# Altium PCB MASTERs26_PCB.PcbDoc (part 1 of 3)
Units mm, origin at the board's own origin, x right, y up, seen from the top; angles counter-clockwise.
Board outline 170 x 105 mm, 4 copper layers (Top Layer, Layer 2, PWR, Bottom Layer), stack 1.58 mm thick; 78 components, 59 nets, 255 pads, 54 vias.
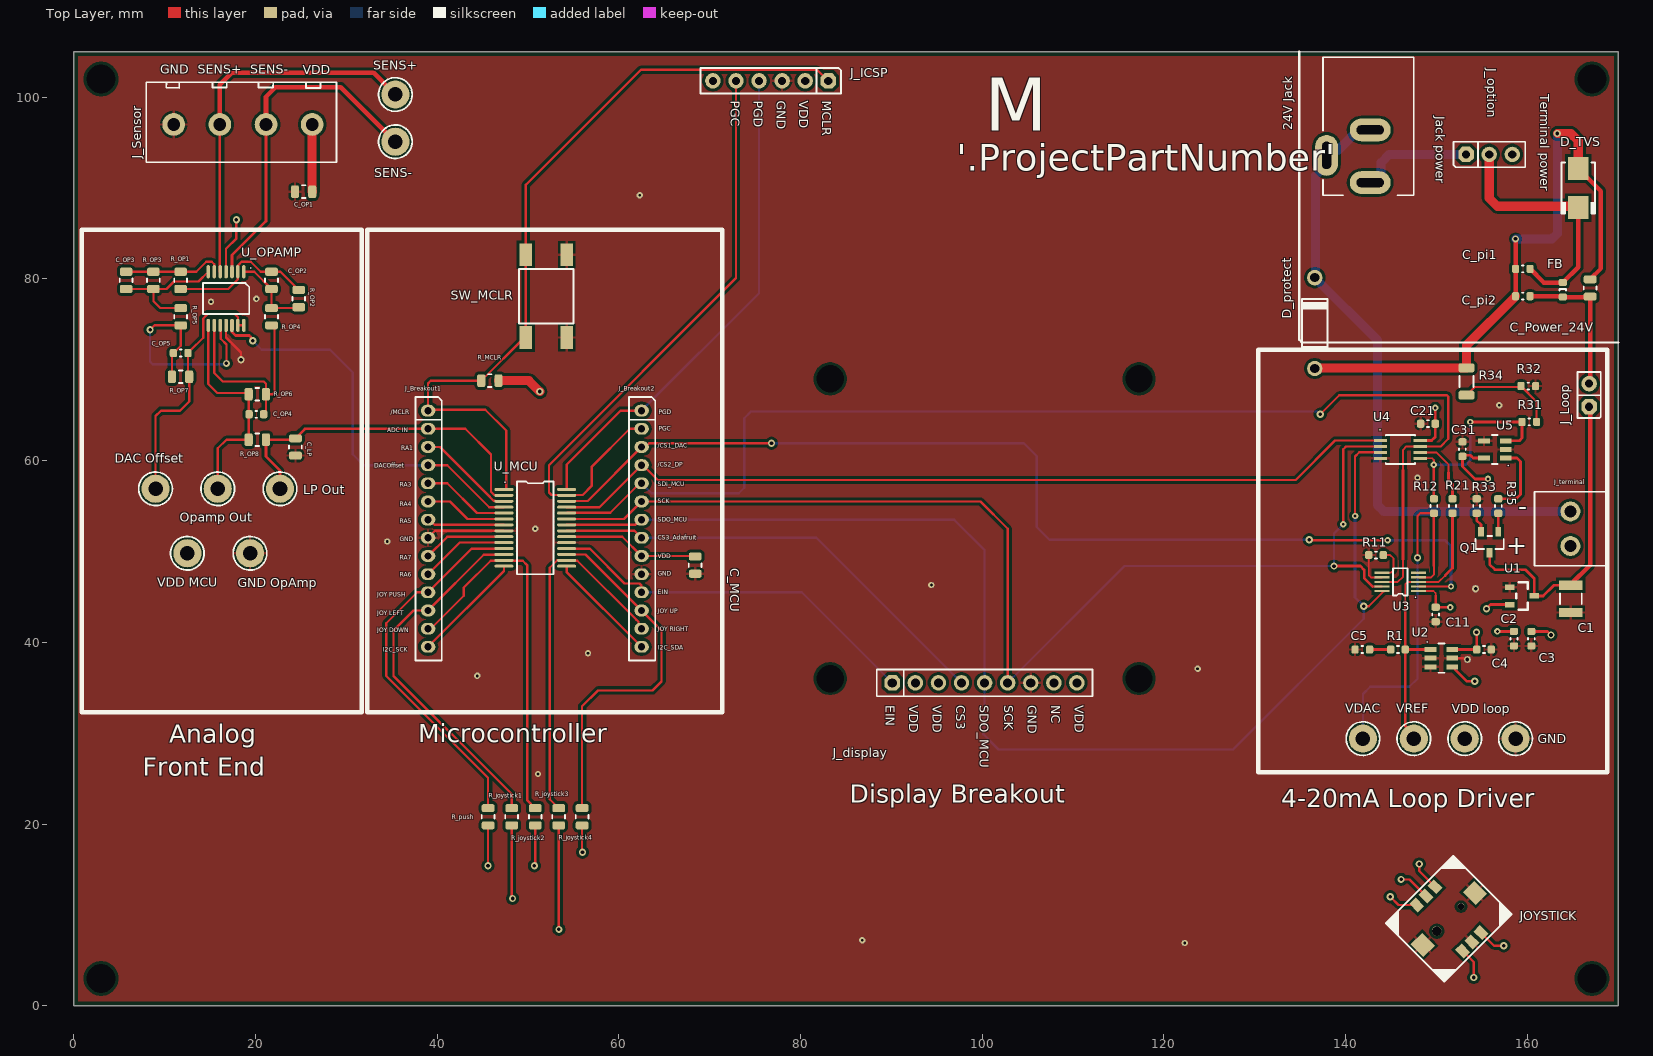
[diagram p0: Top Layer view]
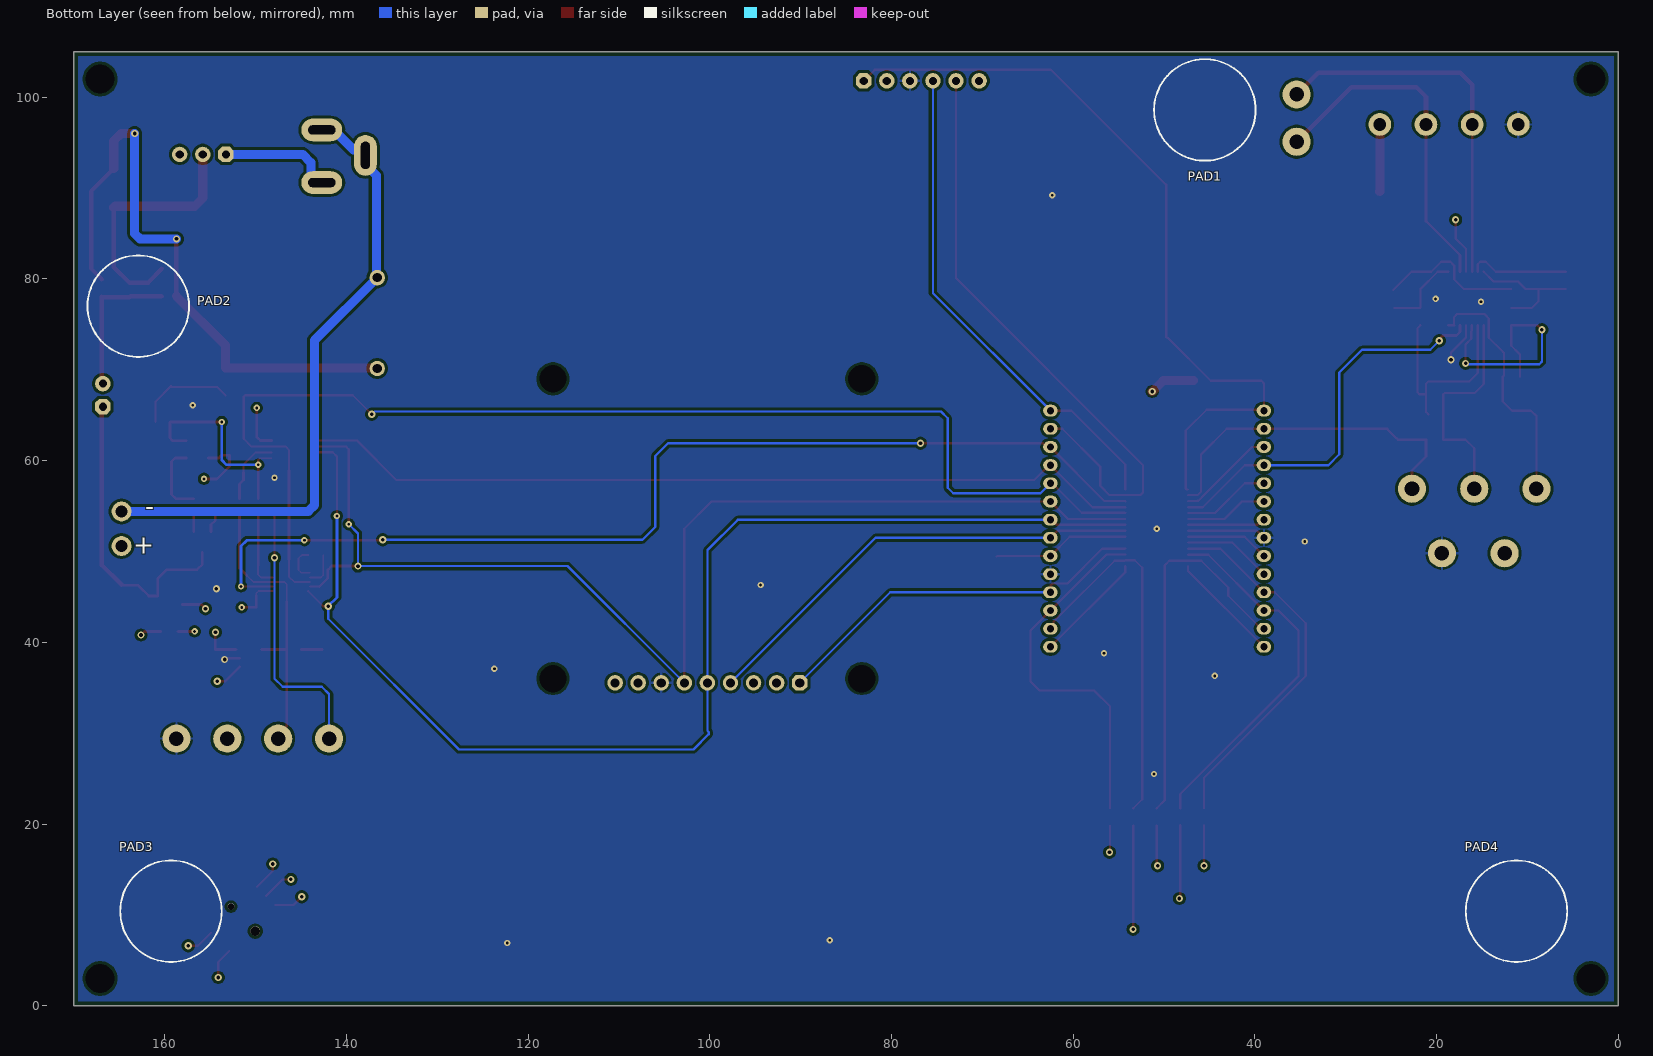
[diagram p1: Bottom Layer view, seen from below]
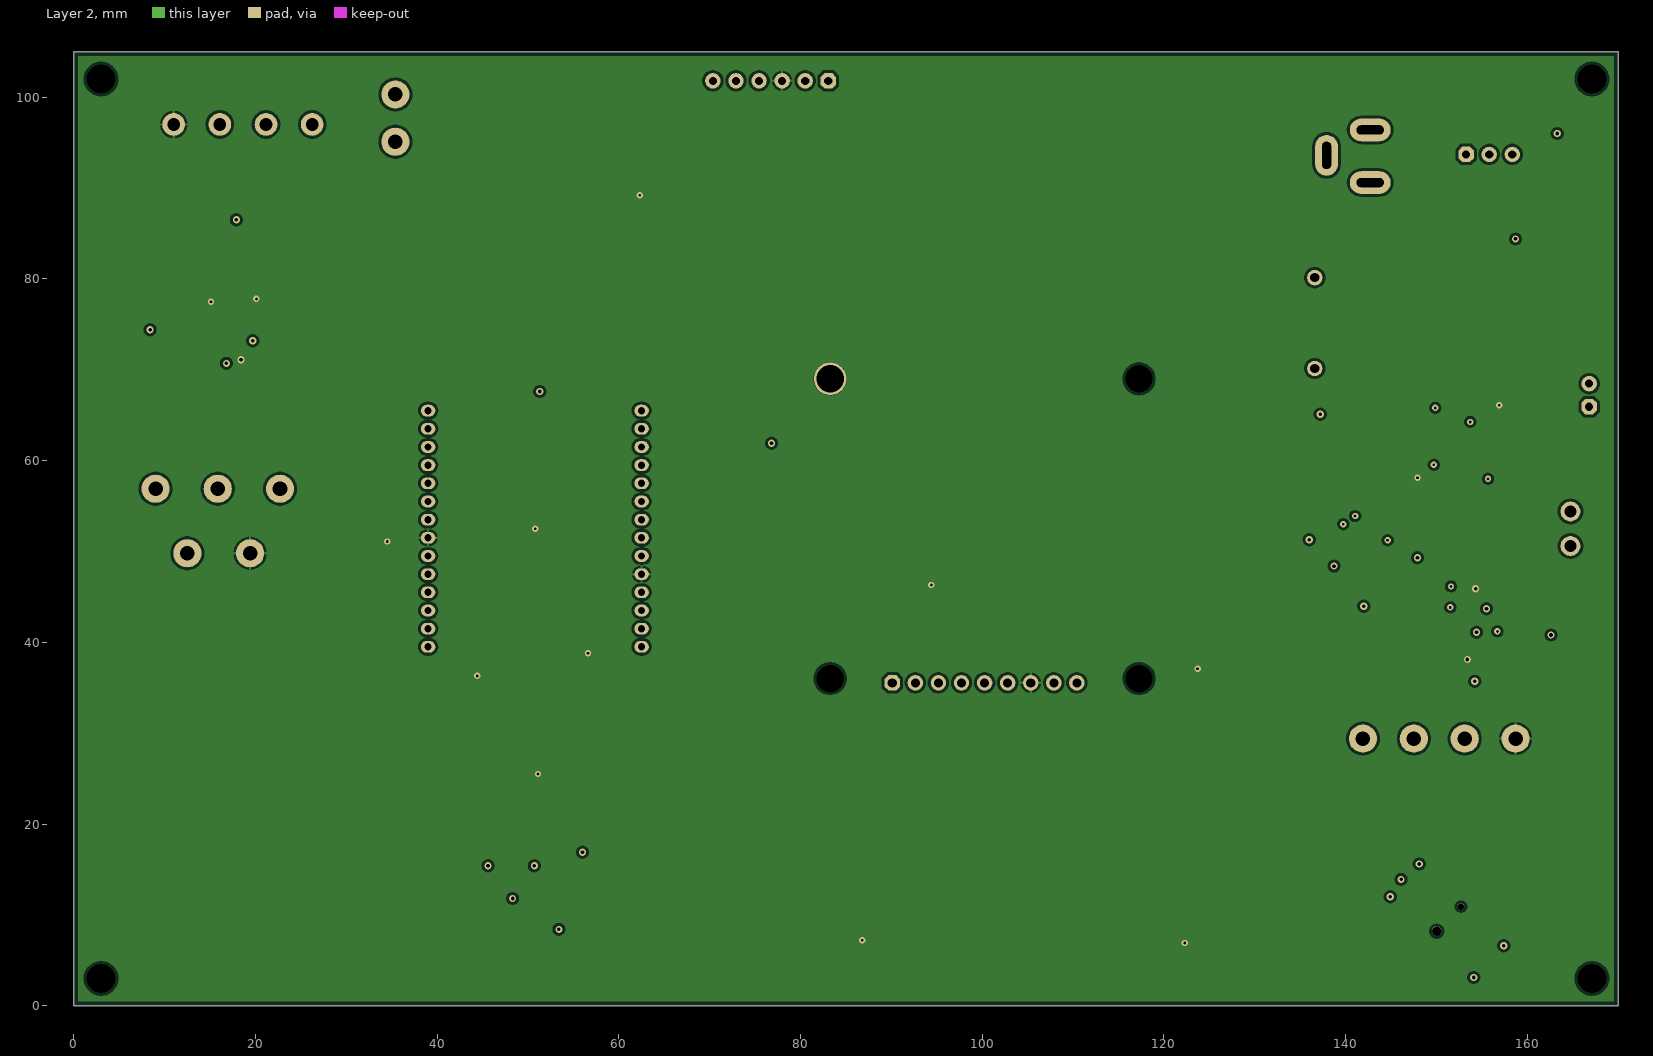
[diagram p2: Layer 2]
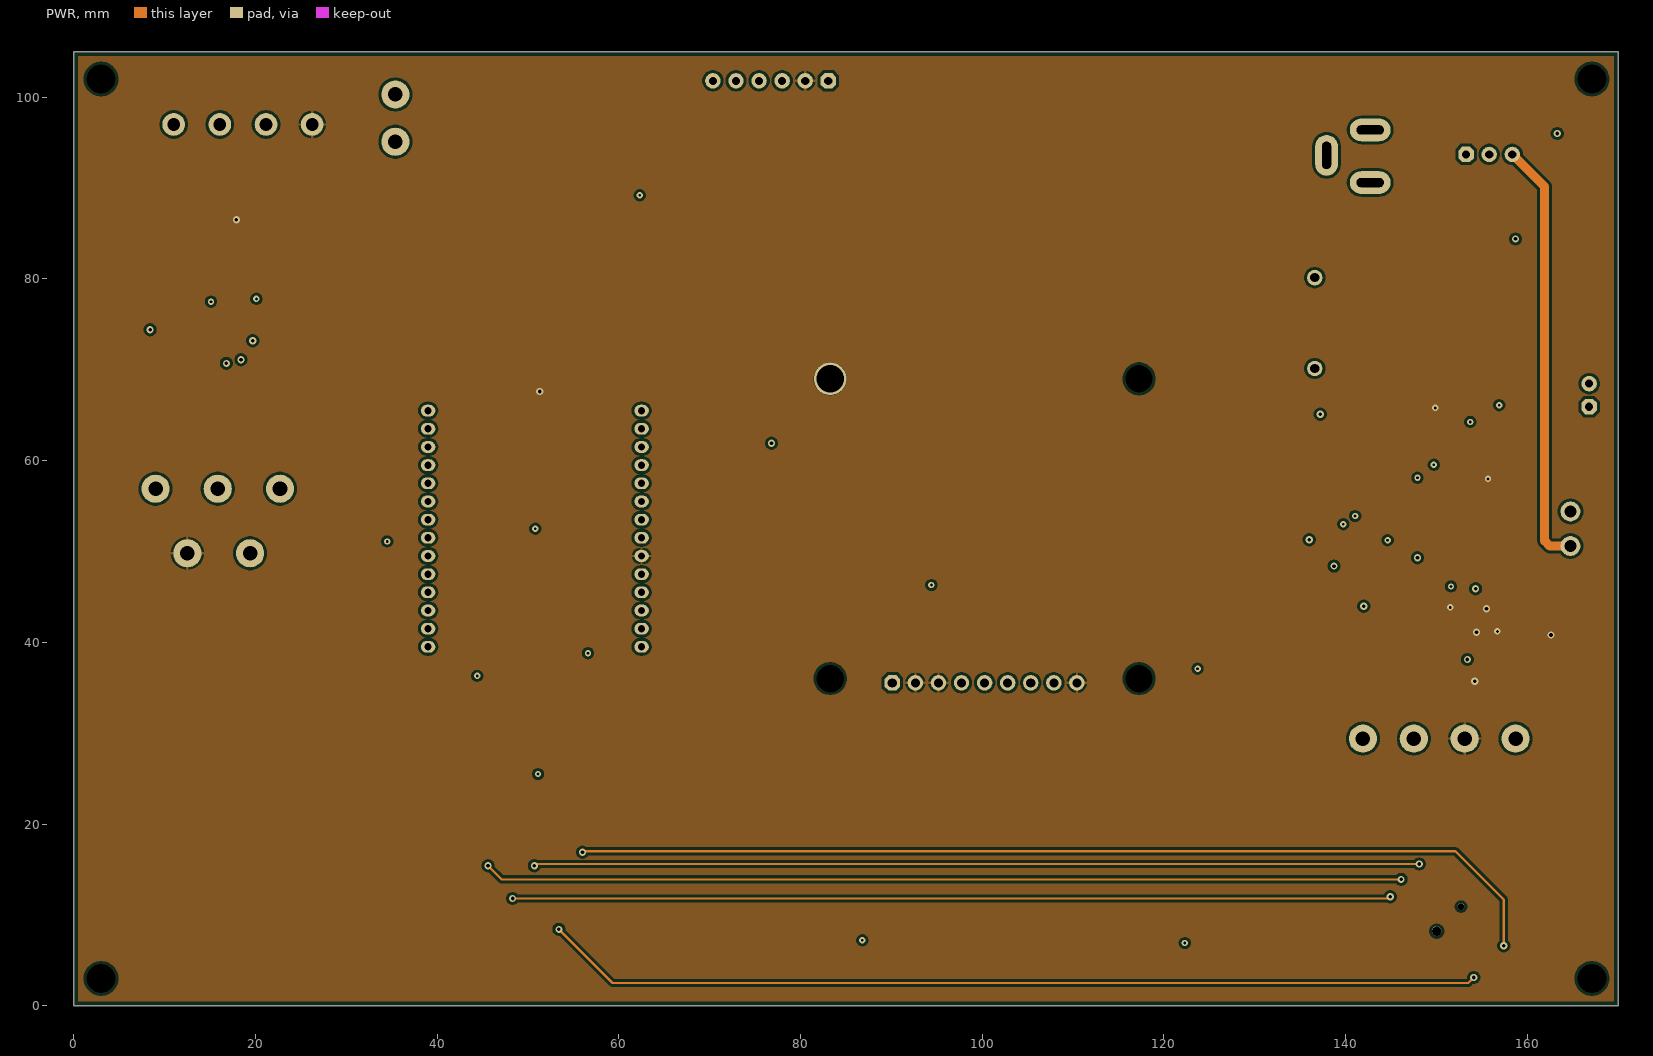
[diagram p3: PWR]

## Layer stack, top to bottom
Top Solder: solder mask 0.01, Solder Resist, Dk 3.5
Top Layer: signal copper 0.035
Dielectric 1: prepreg 0.22, PP-006, Dk 4.1
Layer 2: signal copper 0.035
Dielectric1: core 1, FR-4, Dk 4.8
PWR: signal copper 0.035
Dielectric 4: prepreg 0.22, PP-006, Dk 4.1
Bottom Layer: signal copper 0.035
Bottom Solder: solder mask 0.01, Solder Resist, Dk 3.5

## Board outline
0,0 0,105 170,105 170,0

## Design rules (kind name [scope] priority, off if disabled: settings)
AcuteAngle [All] p1: minimum=9.00000000000000E+0001 checktracksonly=TRUE
BoardOutlineClearance "Ignore Title Block elements" [InNamedUnion('Title Block')] p1: gap=0 ignorepadtopadclearanceinfootprint=FALSE
BoardOutlineClearance BoardOutlineClearance_Overlay [OnLayer('Top Overlay','Bottom Overlay')] p2: gap=0.2 ignorepadtopadclearanceinfootprint=FALSE
BoardOutlineClearance [All] p3: gap=0.5 ignorepadtopadclearanceinfootprint=FALSE
Clearance "Net to Polygon 0.5mm" [InNet('your net here') vs (IsRegion)] p1: gap=0.5 ignorepadtopadclearanceinfootprint=FALSE
Clearance "Poly 0.3mm" [(IsRegion)] p2: gap=0.3 ignorepadtopadclearanceinfootprint=FALSE
Clearance [All] p3: gap=0.25 ignorepadtopadclearanceinfootprint=TRUE
ComponentClearance ComponentClearance_ignore [HasFootprint('NET_TIE_0.5mm')] p1: gap=0 collisioncheckmode=3 verticalgap=0 showdistances=FALSE
ComponentClearance [All] p2: gap=0.2 collisioncheckmode=3 verticalgap=0.2 showdistances=FALSE
DiffPairsRouting [All] p1: maxlimit=0.254 minlimit=0.25 mostfreqgap=0.254 toplayer_maxgap=0.25 toplayer_prefgap=0.25 toplayer_minwidth=0.25 toplayer_maxwidth=0.25 toplayer_prefwidth=0.25 midlayer2_mingap=0.254 midlayer2_minwidth=0.381 midlayer2_maxwidth=0.381 midlayer2_prefwidth=0.381 midlayer3_mingap=0.254 midlayer3_minwidth=0.381 midlayer3_maxwidth=0.381 midlayer3_prefwidth=0.381 bottomlayer_maxgap=0.25 bottomlayer_prefgap=0.25 bottomlayer_minwidth=0.25 bottomlayer_maxwidth=0.25 bottomlayer_prefwidth=0.25 maxuncoupledlength=12.7
FabricationTestPointUsage TestPointUsage [All] p1: valid=0 allowmultiple=FALSE
FabricationTestpoint Testpoint [All] p1: side=3 testpointundercomponent=TRUE minsize=1.016 maxsize=2.54 preferedsize=1.524 minholesize=0 maxholesize=1.016 preferedholesize=0.813 testpointgrid=0.025 allowsidetop=TRUE allowsidebottom=TRUE usegrid=TRUE gridtolerance=0
HoleSize [All] p1: absolutevalues=TRUE maxlimit=6 minlimit=0.25 maxpercent=80.000 minpercent=20.000
HoleToHoleClearance [All] p1: gap=0.3 allowstackedmicrovias=FALSE
MinimumAnnularRing [All] p1: minimumring=0.15
MinimumSolderMaskSliver [All] p1: minsoldermaskwidth=0.15
PasteMaskExpansion PasteMaskExpansion_DNP [IsPad AND HasCompParameterValue('Populated','DNP')] p1: expansion=-5
PasteMaskExpansion [All] p2: expansion=0
PlaneClearance PlaneClearance_pads [IsPad] p1: clearance=0.3
PlaneClearance PlaneClearance_drill [IsObjectKind('Hole')] p2: clearance=0.4
PlaneConnect PlaneConnect_full [IsVia] p1: planeconnectstyle=Direct reliefexpansion=0.5 reliefentries=4 reliefconductorwidth=0.3 reliefairgap=0.3
PlaneConnect [All] p2: planeconnectstyle=Relief reliefexpansion=0.3 reliefentries=4 reliefconductorwidth=0.25 reliefairgap=0.25
PolygonConnect PolygonConnect_0.7 [IsNamedPolygon('0.7mm') vs (InPadClass('All Pads'))] p1: connectstyle=Relief reliefconductorwidth=0.7 reliefentries=4 polygonreliefangle="90 Angle" airgapwidth=0.25
PolygonConnect PolygonConnect_0.5 [IsNamedPolygon('0.5mm') vs (InPadClass('All Pads'))] p2: connectstyle=Relief reliefconductorwidth=0.5 reliefentries=4 polygonreliefangle="90 Angle" airgapwidth=0.25
PolygonConnect PolygonConnect_full [All vs IsVia or IsNamedPolygon('full')] p3: connectstyle=Direct reliefconductorwidth=0 reliefentries=4 polygonreliefangle="90 Angle" airgapwidth=0.254
PolygonConnect [All] p4: connectstyle=Relief reliefconductorwidth=0.3 reliefentries=4 polygonreliefangle="90 Angle" airgapwidth=0.25
RoutingCorners [All] p1: cornerstyle=45-Degree minsetback=2.5 maxsetback=2.5
RoutingLayers [All] p1: top layer_v5=TRUE mid layer 2_v5=FALSE mid layer 3_v5=TRUE bottom layer_v5=TRUE
RoutingVias [All] p1: holewidth=0.4 width=0.8 viastyle="Through Hole" minholewidth=0.3 minwidth=0.7 maxholewidth=1.6 maxwidth=2.5
SMDToCorner [All] p1: distance=19685
ShortCircuit [IsNet] p1: allowed=FALSE
SilkToSilkClearance [All] p1: silktosilkclearance=0.15
SilkToSolderMaskClearance SilkscreenOverComponentPads [IsPad] p1: minsilkscreentomaskgap=0.2 clearancetoexposedcopper=TRUE
SolderMaskExpansion SolderMaskExpansion_Component_Via [IsComponentVia] p1: expansion=0.075 istentingtop=FALSE soldermaskfromhole=TRUE
SolderMaskExpansion [All] p2: expansion=0.1 istentingtop=FALSE
SupplyNets "Schematic Supply Nets_6" [InNet('24V_Term_Not_Filtered')] p1: voltage=0.000
SupplyNets "Schematic Supply Nets_4" [InNet('24V_Jack_Not_Filtered')] p2: voltage=0.000
SupplyNets "Schematic Supply Nets" [InNet('24V_IN_Not_Filtered')] p3: voltage=0.000
SupplyNets "Schematic Supply Nets_5" [InNet('24V_Filtered')] p4: voltage=0.000
SupplyNets "Schematic Supply Nets_3" [InNet('GND')] p5: voltage=0.000
SupplyNets "Schematic Supply Nets_2" [InNet('2.5V')] p6: voltage=0.000
SupplyNets "Schematic Supply Nets_1" [InNet('3.3V')] p7: voltage=0.000
UnRoutedNet [All] p1: checkbadconnections=TRUE
ViasUnderSMD [All] p1: allowed=FALSE
Width Width_FG [All] p1: maxlimit=1 minlimit=0.2 preferedwidth=0.5
Width Width_24NotFiltered [InNet('24V_Not_Filtered')] p2: maxlimit=1 minlimit=0.25 preferedwidth=0.5
Width Width_24Filtered [InNet('24V_Filtered')] p3: maxlimit=1 minlimit=0.25 preferedwidth=0.5
Width Width_3V3 [InNet('3.3V')] p4: maxlimit=1 minlimit=0.25 preferedwidth=0.5
14 further rules are at their usual default settings.

## Classes and differential pairs
component class Power: "24V Jack" C_pi1 C_pi2 C_Power_24V D_protect D_TVS FB J_Loop J_option J_terminal
component class Pad: PAD1 PAD2 PAD3 PAD4
component class LoopDriver: C1 C2 C3 C4 C5 C11 C21 C31 GND Q1 R1 R11 R12 R21 R31 R32 R33 R34 R35 U1 U2 U3 U4 U5 VDAC "VDD loop" VREF

## Components (designator, comment, footprint, x,y, rotation, side; value= is the part's Value field where it differs from the comment)
"24V Jack" "CON JACK 2C 3P SPST" CON_JACK_POWER_TH_RA_WE_694106301002 142.7,93.6 r270 top value="POWER 2.1mm"
C1 "" CAP_C_1210 164.786,44.781 r90 top value=2.2uF
C2 "" CAP_C_0603 158.522,40.399 r90 top value=2.2uF
C3 "" CAP_C_0603 160.439,40.399 r90 top value=0.1uF
C4 "" CAP_C_0603 155.222,39.202 r0 top value=0.1uF
C5 "" CAP_C_0603 141.839,39.202 r0 top value=2.2uF
C11 "" CAP_C_0603 149.91,43.063 r270 top value=0.1uF
C21 "" CAP_C_0603 149.06,64.059 r0 top value=0.1uF
C31 "" CAP_C_0603 152.85,61.266 r90 top value=0.1uF
C_LP "Capacitor NP" CAP_C_0805 24.4,61.5 r90 top value=0.033uF
C_MCU "Capacitor NP" CAP_C_0805 68.4,48.5 r270 top value=10000pF
C_OP1 "Capacitor NP" CAP_C_0805 25.3,89.6 r180 top value=10000pF
C_OP2 "Capacitor NP" CAP_C_0805 21.763,79.838 r270 top value=0.015uF
C_OP3 "Capacitor NP" CAP_C_0805 5.763,79.838 r270 top value=0.015uF
C_OP4 "Capacitor NP" CAP_C_0603 20.1,65.1 r180 top value=6800pF
C_OP5 "Capacitor NP" CAP_C_0603 11.763,71.838 r0 top value=6800pF
C_pi1 "Capacitor NP" CAP_C_0603 159.5,81.1 r0 top value=0.1uF
C_pi2 "Capacitor NP" CAP_C_0603 159.5,78.1 r0 top value=0.1uF
C_Power_24V "Capacitor NP" CAP_C_0805 166.9,79 r270 top value=10uF
D_protect "Diode Single" DO-41 136.6,75.139 r90 top value=1N4007
D_TVS "Diode TVS Unidirectional" DO-214AA_SMB 165.6,90 r270 top value=SMBJ30A
"DAC Offset" "Test Point" CON_TP_TH_V_RED_KEC_5010 9,56.9 r0 top value="TP LOOP Red"
FB "Ferrite Bead" IND_C_0603 163.9,78.8 r270 top value=1k
GND "Test Point" CON_TP_TH_V_BLK_KEC_5011 158.7,29.4 r0 top value="TP LOOP Black TH"
"GND OpAmp" "Test Point" CON_TP_TH_V_BLK_KEC_5011 19.4,49.8 r0 top value="TP LOOP Black TH"
J_Breakout1 "Header 1x14" HDR_F_2_1x14_TH_V 39,52.5 r270 top value="HDR-2 Female 1x14"
J_Breakout2 "Header 1x14" HDR_F_2_1x14_TH_V 62.5,52.5 r270 top value="HDR-2 Female 1x14"
J_display "Header 1x9" HDR_F_2.54_1x9_TH_V_PPPC091LFBN-RC 100.255,35.541 r0 top value="HDR-2.54 Female 1x9"
J_ICSP "Header 1x6" HDR_M_2.54_1x6 76.7,101.8 r180 top value="HDR-2.54 Male 1x6"
J_Loop "Header 1x2" HDR_M_2.54_1x2 166.8,67.2 r90 top value="HDR-2.54 Male 1x2"
J_option "" HDR_M_2.54_1x3 155.8,93.7 r0 top value="HDR-2.54 Male 1x3"
J_Sensor "Header 1x4" CON_TERMINAL_5.08_1x4_TH_L8.50W20.5H10.20 18.62,97 r180 top value="TERMINAL 1x4"
J_terminal "" CON_TERMINAL_3.81_1x2_TH_RA_PHO_1727010 164.739,52.499 r90 top value="TERMINAL 1x2"
JOYSTICK "SW_TACT_SMD_ALPS_SKRHABE010" SW_TACT_SMD_ALPS_SKRHABE010 151.356,9.556 r315 top value="JOYSTICK 4-WAY"
"LP Out" "Test Point" CON_TP_TH_V_RED_KEC_5010 22.7,56.9 r0 top value="TP LOOP Red"
"Opamp Out" "Test Point" CON_TP_TH_V_RED_KEC_5010 15.85,56.9 r0 top value="TP LOOP Red" (schematic designator "OpAmp Out")
PAD1 "Rubber Pad Hemisphere" BUMP_3M_SJ5000_CYLINDRICAL_BLACK_D11.18H5 45.5,98.6 r180 bottom value="Bumpon Hemisphere Black"
PAD2 "Rubber Pad Hemisphere" BUMP_3M_SJ5000_CYLINDRICAL_BLACK_D11.18H5 162.9,77 r180 bottom value="Bumpon Hemisphere Black"
PAD3 "Rubber Pad Hemisphere" BUMP_3M_SJ5000_CYLINDRICAL_BLACK_D11.18H5 159.3,10.4 r180 bottom value="Bumpon Hemisphere Black"
PAD4 "Rubber Pad Hemisphere" BUMP_3M_SJ5000_CYLINDRICAL_BLACK_D11.18H5 11.2,10.4 r180 bottom value="Bumpon Hemisphere Black"
Q1 "" SOT-23-3 155.847,51.005 r180 top value=2N7002-G
R1 "" RES_C_0603 145.761,39.202 r0 top value=51R
R11 "" RES_C_0603 143.341,49.6 r0 top value=100k
R12 "" RES_C_0603 149.71,54.999 r90 top value=15k
R21 "" RES_C_0603 151.765,54.999 r90 top value=47k
R31 "" RES_C_0603 160.211,64.259 r180 top value=2.2k
R32 "" RES_C_0603 160.1,68.2 r0 top value=22R
R33 "" RES_C_0603 154.422,54.999 r270 top value=22R
R34 "" RES_C_1206 153.3,68.7 r90 top value=249R
R35 "" RES_C_0603 156.797,54.999 r270 top value=1.8k
R_joystick1 "Resistor" RES_C_0805 48.2,20.8 r270 top value=1k
R_joystick2 "Resistor" RES_C_0805 50.8,20.795 r90 top value=1k
R_joystick3 "Resistor" RES_C_0805 53.375,20.795 r270 top value=1k
R_joystick4 "Resistor" RES_C_0805 55.95,20.795 r270 top value=1k
R_MCLR "Resistor" RES_C_0805 45.8,68.8 r180 top value=10k
R_OP1 "Resistor" RES_C_0805 11.763,79.838 r270 top value=10k
R_OP2 "Resistor" RES_C_0805 24.763,77.838 r270 top value=100k
R_OP3 "Resistor" RES_C_0805 8.763,79.838 r270 top value=100k
R_OP4 "Resistor" RES_C_0805 21.763,75.838 r90 top value=10k
R_OP5 "Resistor" RES_C_0805 11.763,75.838 r270 top value=10k
R_OP6 "Resistor" RES_C_0805 20.2,67.3 r180 top value=200k
R_OP7 "Resistor" RES_C_0805 11.75,69.232 r0 top value=200k
R_OP8 "Resistor" RES_C_0805 20.2,62.3 r0 top value=4.7k
R_push "Resistor" RES_C_0805 45.6,20.8 r270 top value=1k
SENS+ "Test Point" CON_TP_TH_V_RED_KEC_5010 35.4,100.3 r0 top value="TP LOOP Red"
SENS- "Test Point" CON_TP_TH_V_BLK_KEC_5011 35.4,95.1 r0 top value="TP LOOP Black TH"
SW_MCLR "Switch 4 Pin" SW_SMD_6mmX6mm_TL3301 52,78.1 r90 top value="TACT SPST"
U1 "" SOT-23A-3 159.411,45.099 r270 top value=MCP1792T-3302H/CB
U2 "" SOT-23-6 150.539,38.252 r270 top value=MCP1501/2.50V
U3 "" MSOP-10 146.016,46.649 r180 top value=MCP48CMD21T-E/UN
U4 "" MSOP-8 146.016,61.232 r0 top value=MCP4152T-503E/MS
U5 "" SOT-23-5 156.422,61.232 r90 top value=MCP6021
U_MCU "PIC18F2XK42 SPDIP-28_SOIC-28_SSOP-28" SSOP-28_P0.65 50.8,52.6 r0 top value=PIC18F26Q71
U_OPAMP "MCP6XX4_9 SOIC-14_TSSOP-14_PDIP-14" TSSOP-14 16.763,77.838 r270 top value=MCP6V14
VDAC "" CON_TP_TH_V_RED_KEC_5010 141.9,29.4 r0 top value="TP LOOP Red"
"VDD loop" "" CON_TP_TH_V_RED_KEC_5010 153.1,29.4 r0 top value="TP LOOP Red"
"VDD MCU" "Test Point" CON_TP_TH_V_RED_KEC_5010 12.5,49.8 r0 top value="TP LOOP Red"
VREF "" CON_TP_TH_V_RED_KEC_5010 147.5,29.4 r0 top value="TP LOOP Red"

## Footprints (in the part's own frame and the unit in brackets; to place one, negate y for a bottom-side part, rotate by r counter-clockwise, add the part's x,y. Pads: shape width x height; smd on the part's side, far side on the other; paste and mask are expansions set on the pad)
BUMP_3M_SJ5000_CYLINDRICAL_BLACK_D11.18H5 [mm] "3M Bumpon Cylindrical D=11.18mm H=5mm"
  silkscreen extent -5.59,-5.58 5.59,5.58, body extent -4.89,-4.71 4.64,4.81, height 5.97
CAP_C_0603 [mm] "Chip Capacitor, 2-Leads, Body 1.6x0.8mm, IPC Medium Density"
  rrect50% 0.8x0.9 smd: 1(-0.8,0) 2(0.8,0)
  silkscreen extent -0.1,-0.38 0.1,0.38, body extent -0.8,-0.4 0.8,0.4, height 0.85
CAP_C_0805 [mm] "Chip Capacitor, 2-Leads, Body 2.0x1.3mm, IPC Medium Density"
  rrect50% 0.9x1.4 smd: 1(-0.95,0) 2(0.95,0)
  silkscreen extent -0.2,-0.7 0.2,0.7, body extent -1,-0.62 1,0.63, height 0.78
CAP_C_1210 [mm] "Chip Capacitor, 2-Leads, Body 3.2x2.5mm, IPC Medium Density"
  rect 1x2.6 smd: 1(-1.5,0) 2(1.5,0)
  silkscreen extent -0.6,-1.2 0.6,1.2, body extent -1.6,-1.25 1.6,1.25, height 0.95
CON_JACK_POWER_TH_RA_WE_694106301002 [mm] "CONN POWER JACK MALE 2.1MMX5.5mm CLSD"
  oval 2.5x4.5 hole 1 slot 3 at 90 deg: 1(3,0) 2(-2.8,0)
  oval 4.5x2.5 hole 1 slot 3 at 0 deg: 3(0,-4.8)
  silkscreen extent -10.8,-5.2 4.4,4.8, body extent -10.6,-5.05 3.9,4.45, height 10.35
CON_TERMINAL_3.81_1x2_TH_RA_PHO_1727010 [mm] "Terminal Block 3.81mm Pitch 1x2 PHO_1727010"
  round 2.2 hole 1.3: 1(-1.905,0) 2(1.905,0)
  silkscreen extent -4.07,-3.91 4.08,3.96, body extent -3.81,-3.61 3.81,3.69, height 8.51
CON_TERMINAL_5.08_1x4_TH_L8.50W20.5H10.20 [mm] "Screw Terminal 0395443004, 4-Way"
  round 2.5 hole 1.4: 1(-7.62,0) 2(-2.54,0) 3(2.54,0) 4(7.62,0)
  silkscreen extent -10.29,-4.65 10.64,4.17, body extent -10.49,-4.07 10.07,4.09, height 10
CON_TP_TH_V_BLK_KEC_5011 [mm] "TEST POINT PC MULTI PURPOSE BLK"
  round 3.1 hole 1.6: 1(0,0)
  silkscreen extent -1.85,-1.85 1.85,1.85, body extent -1.59,-1.59 1.59,1.59, height 8.13
CON_TP_TH_V_RED_KEC_5010 [mm] "TEST POINT PC MULTI PURPOSE RED"
  round 3.1 hole 1.6: 1(0,0)
  silkscreen extent -1.85,-1.85 1.85,1.85, body extent -1.59,-1.59 1.59,1.59, height 8.13
DO-41 [mm] "Diode Axial 10mm pitch, 5mm Length, 2.8mm Width"
  round 1.7 hole 1: 1(-5,0) 2(5,0)
  silkscreen extent -2.65,-1.4 2.65,1.4, body extent -5.43,-1.38 5.43,1.35, height 3.36
DO-214AA_SMB [mm] "SMB Molded Diode, 2-Leads, Body 5.3x3.6mm, IPC Medium Density"
  rect 2.5x2.3 smd: 1(-2.15,0) 2(2.15,0)
  silkscreen extent -2.8,-1.85 2.8,1.85, body extent -2.78,-1.8 2.62,1.8, height 2.3
HDR_F_2.54_1x9_TH_V_PPPC091LFBN-RC [mm]
  oct 1.7x1.7 hole 1: 1(-10.16,0)
  round 1.7 hole 1: 2(-7.62,0) 3(-5.08,0) 4(-2.54,0) 5(0,0) 6(2.54,0) 7(5.08,0) 8(7.62,0) 9(10.16,0)
  silkscreen extent -11.88,-1.47 11.88,1.47, body extent -11.68,-1.27 11.68,1.27, height 8.5
HDR_F_2_1x14_TH_V [mm] "14-Pin Socket Strip"
  oval 1.3x1.6 hole 0.8 mask+0.075: 1(-13,0) 2(-11,0) 3(-9,0) 4(-7,0) 5(-5,0) 6(-3,0) 7(-1,0) 8(1,0) 9(3,0) 10(5,0) 11(7,0) 12(9,0) 13(11,0) 14(13,0)
  silkscreen extent -14.5,-1.4 14.5,1.5, body extent -14.25,-1.15 14.25,1.25, height 4.46
HDR_M_2.54_1x2 [mm] "Header Male Vertical 2 Way 2.54mm Pitch"
  oct 1.7x1.7 hole 0.9: 1(-1.27,0)
  round 1.7 hole 0.9: 2(1.27,0)
  silkscreen extent -2.52,-1.27 2.54,1.28, body extent -2.54,-1.27 2.54,1.27, height 5.94
HDR_M_2.54_1x3 [mm] "Header Male Vertical 4 Way P=2.54mm"
  oct 1.7x1.7 hole 0.9: 1(-2.54,0)
  round 1.7 hole 0.9: 2(0,0) 3(2.54,0)
  silkscreen extent -3.94,-1.4 3.96,1.4, body extent -3.8,-1.26 3.82,1.28, height 5.94
HDR_M_2.54_1x6 [mm] "Header Male Vertical 6 Way 2.54mm Pitch"
  oct 1.7x1.7 hole 0.9: 1(-6.35,0)
  round 1.7 hole 0.9: 2(-3.81,0) 3(-1.27,0) 4(1.27,0) 5(3.81,0) 6(6.35,0)
  silkscreen extent -7.75,-1.4 7.7,1.4, body extent -7.62,-1.27 7.62,1.27, height 8.38
IND_C_0603 [mm] "Chip Inductor, 2-Leads, Body 1.6x0.8mm, IPC Medium Density"
  rrect50% 0.8x0.9 smd: 1(-0.8,0) 2(0.8,0)
  silkscreen extent -0.1,-0.35 0.1,0.35, body extent -0.8,-0.4 0.8,0.4, height 0.95
MSOP-8 [mm] "MSOP, 8-Leads, Body 4.9.0x3.0mm (max), Pitch 0.65mm, IPC Medium Density"
  rect 1.45x0.33 smd paste-0.064 mask+0.05: 1(-2.2,0.975) 2(-2.2,0.325) 3(-2.2,-0.325) 4(-2.2,-0.975) 5(2.2,-0.975) 6(2.2,-0.325) 7(2.2,0.325) 8(2.2,0.975)
  silkscreen extent -1.6,-1.6 1.6,1.6, body extent -2.45,-1.5 2.45,1.5, height 1.15
MSOP-10 [mm] "MSSOP, 10-Leads, Body 3.0x3.0mm (max), Pitch 0.50mm, IPC Medium Density"
  rect 1.65x0.25 smd mask+0.05: 1(-2.025,1) 2(-2.025,0.5) 3(-2.025,0) 4(-2.025,-0.5) 5(-2.025,-1) 6(2.025,-1) 7(2.025,-0.5) 8(2.025,0) 9(2.025,0.5) 10(2.025,1)
  silkscreen extent -0.8,-1.5 0.8,1.5, body extent -2.45,-1.5 2.45,1.5, height 1.15
RES_C_0603 [mm] "Chip Resistor, 2-Leads, Body 1.6x0.8mm, IPC Medium Density"
  rrect50% 0.8x0.9 smd: 1(-0.8,0) 2(0.8,0)
  silkscreen extent -0.1,-0.38 0.1,0.38, body extent -0.8,-0.4 0.8,0.4, height 0.3
RES_C_0805 [mm] "Chip Resistor, 2-Leads, Body 2.0x1.3mm, IPC Medium Density"
  rrect50% 0.9x1.4 smd: 1(-0.95,0) 2(0.95,0)
  silkscreen extent -0.2,-0.7 0.2,0.7, body extent -1,-0.63 1,0.63, height 0.78
RES_C_1206 [mm] "Chip Resistor, 2-Leads, Body 3.2x1.6mm, IPC Medium Density"
  rrect50% 1x1.75 smd: 1(-1.5,0) 2(1.5,0)
  silkscreen extent -0.6,-0.77 0.6,0.78, body extent -1.6,-0.8 1.6,0.8, height 1
SOT-23-3 [mm]
  rect 0.65x1.05 smd: 1(-0.95,-1.15) 2(0.95,-1.15) 3(0,1.15)
  silkscreen extent -1.55,-0.7 1.55,0.72, body extent -1.5,-1.25 1.5,1.25, height 1.09
SOT-23-5 [mm] "SOT-23-5"
  rect 0.55x1.3 smd: 1(-0.95,-1.2) 2(0,-1.2) 3(0.95,-1.2) 4(0.95,1.2) 5(-0.95,1.2)
  silkscreen extent -1.6,-0.33 1.6,0.33, body extent -1.5,-1.25 1.5,1.25, height 1.08
SOT-23-6 [mm] "SOT-23-6"
  rect 0.55x1.3 smd: 1(-0.95,-1.2) 2(0,-1.2) 3(0.95,-1.2) 4(0.95,1.2) 5(0,1.2) 6(-0.95,1.2)
  silkscreen extent -1.6,-0.33 1.6,0.33, body extent -1.5,-1.5 1.5,1.5, height 1.5
SOT-23A-3 [mm]
  rect 0.6x1 smd: 1(-0.95,-1.35) 2(0.95,-1.35) 3(0,1.35)
  silkscreen extent -1.52,-0.65 1.52,0.62, body extent -1.5,-1.25 1.5,1.25, height 1.09
SSOP-28_P0.65 [mm] "SOP, 28-Leads, Body 10.2x5.3mm (max), Pitch 0.65mm, IPC Medium Density"
  oval 2.1x0.33 smd mask+0.05: 1(-3.45,4.225) 2(-3.45,3.575) 3(-3.45,2.925) 4(-3.45,2.275) 5(-3.45,1.625) 6(-3.45,0.975) 7(-3.45,0.325) 8(-3.45,-0.325) 9(-3.45,-0.975) 10(-3.45,-1.625) 11(-3.45,-2.275) 12(-3.45,-2.925) 13(-3.45,-3.575) 14(-3.45,-4.225) 15(3.45,-4.225) 16(3.45,-3.575) 17(3.45,-2.925) 18(3.45,-2.275) 19(3.45,-1.625) 20(3.45,-0.975) 21(3.45,-0.325) 22(3.45,0.325) 23(3.45,0.975) 24(3.45,1.625) 25(3.45,2.275) 26(3.45,2.925) 27(3.45,3.575) 28(3.45,4.225)
  silkscreen extent -2,-5.1 2,5.1, body extent -4.1,-5.25 4.13,5.25, height 1.92
SW_SMD_6mmX6mm_TL3301 [mm]
  rect 2.5x1.4 smd: 1(-4.55,2.25) 2(4.55,2.25) 3(-4.55,-2.25) 4(4.55,-2.25)
  silkscreen extent -3,-3 3,3, body extent -5,-3 5,3, height 5.12
SW_TACT_SMD_ALPS_SKRHABE010 [mm]
  rect 1.35x1 smd: 1(-3.575,1.425) 2(-3.575,0) 3(-3.575,-1.425) 4(3.575,1.425) 5(3.575,0) 6(3.575,-1.425)
  rect 2x1.8 smd: 7(0,4.05) 8(0,-4.05)
  round 0.75 hole 0.75 unplated: 9(0,1.9)
  round 1.05 hole 1.05 unplated: 10(0,-1.9)
  silkscreen extent -4.58,-5.25 4.58,5.25, body extent -3.74,-3.75 3.74,3.75, height 5
TSSOP-14 [mm] "TSOP, 14-Leads, Body 5.1x4.5mm (max), Pitch 0.65mm, IPC Medium Density"
  oval 1.45x0.4 smd mask+0.05: 1(-2.95,1.95) 2(-2.95,1.3) 3(-2.95,0.65) 4(-2.95,0) 5(-2.95,-0.65) 6(-2.95,-1.3) 7(-2.95,-1.95) 8(2.95,-1.95) 9(2.95,-1.3) 10(2.95,-0.65) 11(2.95,0) 12(2.95,0.65) 13(2.95,1.3) 14(2.95,1.95)
  silkscreen extent -1.7,-2.55 1.7,2.55, body extent -3.2,-2.55 3.2,2.55, height 1.2

## Part data
"24V Jack": library part CON2146, Current=5A, Manufacturer 1="Wuerth Elektronik", Manufacturer Part Number 1=694106301002, Operating Temperature="-40C to 85C", Supplier Part Number 1=732-5930-ND, Voltage=24V, Assembly Type=TH, Category=Connector, ComponentLink1Description="SVN Datasheet", ComponentLink1URL=https://chn-vm-apps.microchip.com/mchprepo/parts/Datasheets/6941xx301002.pdf, ComponentLink2Description="Local Datasheet", ComponentLink2URL=C:\ALTIUM_WORK\00001_MCHP-CDB\Datasheets\6941xx301002.pdf, ComponentLink3Description="Open Symbol", ComponentLink3URL="C:\ALTIUM_WORK\00001_MCHP-CDB\Library\LibraryRefs\CON JACK 2C 3P SPST.SchLib", ComponentLink4Description="Open Footprint", ComponentLink4URL=C:\ALTIUM_WORK\00001_MCHP-CDB\Library\Footprints\CON_JACK_POWER_TH_RA_WE_694106301002.PcbLib, ComponentLink5Description="Open Footprint 2", ComponentLink6Description="Open Footprint 3", ComponentLink7Description="Open Footprint 4", Description_="CON POWER 2.1mm 5.5mm SWITCH TH R/A", Dev Tools Status=Production, MCHP-ID=CON2146, Owner="Narasimha Murthy", Populated=YES, Quantity Override=1, Restricted Sourcing=No, Revision=2, Status="MCL Design", Supplier 1=Digi-Key, Symbol="CON JACK 2C 3P SPST", Type=Power
C1: library part CAP2314, Manufacturer 1="Samsung Electro-Mechanics", Manufacturer 2="TDK Corporation", Manufacturer Part Number 1=CL32B225KCJSNNE, Manufacturer Part Number 2=C3225X7R2A225K230AB, Operating Temperature="-55C to +125C", Package=1210, Supplier Part Number 1=1276-3362-1-ND, Temperature Coefficient=X7R, Tolerance=10%, Voltage=100V, Category=Capacitor, ComponentLink1Description="SVN Datasheet", ComponentLink1URL=https://chn-vm-apps.microchip.com/mchprepo/parts/Datasheets/CL_Series_MLCC_ds.pdf, ComponentLink2Description="Local Datasheet", ComponentLink2URL=C:\ALTIUM_WORK\00001_MCHP-CDB\Datasheets\CL_Series_MLCC_ds.pdf, ComponentLink3Description="Open Symbol", ComponentLink3URL="C:\ALTIUM_WORK\00001_MCHP-CDB\Library\LibraryRefs\Capacitor NP.SchLib", ComponentLink4Description="Open Footprint", ComponentLink4URL=C:\ALTIUM_WORK\00001_MCHP-CDB\Library\Footprints\CAP_C_1210.PcbLib, ComponentLink5Description="Open Footprint 2", ComponentLink6Description="Open Footprint 3", ComponentLink7Description="Open Footprint 4", Description_="CAP CER 2.2uF 100V 10% X7R SMD 1210", Dev Tools Status=Production, MCHP-ID=CAP2314, Owner="Narasimha Murthy", Populated=YES, Quantity Override=1, Revision=3, Status="MCL Design", Supplier 1=Digi-Key, Supplier 2=Digi-Key, Supplier Part Number 2=445-4497-1-ND, Symbol="Capacitor NP", Type=Ceramic
C2 C5: library part CAP0597, Manufacturer 1="TDK Corporation", Manufacturer Part Number 1=C1608X5R1C225K080AB, Operating Temperature="-55C to +85C", Package=0603, Supplier Part Number 1=445-5157-1-ND, Temperature Coefficient=X5R, Tolerance=10%, Voltage=16V, Category=Capacitor, ComponentLink1Description="SVN Datasheet", ComponentLink1URL=https://chn-vm-apps.microchip.com/mchprepo/parts/Datasheets/general_B11.pdf, ComponentLink2Description="Local Datasheet", ComponentLink2URL=C:\ALTIUM_WORK\00001_MCHP-CDB\Datasheets\general_B11.pdf, ComponentLink3Description="Open Symbol", ComponentLink3URL="C:\ALTIUM_WORK\00001_MCHP-CDB\Library\LibraryRefs\Capacitor NP.SchLib", ComponentLink4Description="Open Footprint", ComponentLink4URL=C:\ALTIUM_WORK\00001_MCHP-CDB\Library\Footprints\CAP_C_0603.PcbLib, ComponentLink5Description="Open Footprint 2", ComponentLink6Description="Open Footprint 3", ComponentLink7Description="Open Footprint 4", Description_="CAP CER 2.2uF 16V 10% X5R SMD 0603", Dev Tools Status=Production, MCHP-ID=CAP0597, Populated=Yes, Quantity Override=1, Revision=6, Status="MCL Design", Supplier 1=Digi-Key, Symbol="Capacitor NP", Type=Ceramic
C3 C4 C11 C21 C31: library part CAP2605, Manufacturer 1=KEMET, Manufacturer 2="KYOCERA AVX", Manufacturer 4="Samsung Electro-Mechanics", Manufacturer 5="TDK Corporation", Manufacturer 6=Walsin, Manufacturer Part Number 1=C0603C104K3RAC7013, Manufacturer Part Number 2=06033C104KAZ2A, Manufacturer Part Number 3=06033C104KAT4A, Manufacturer Part Number 4=CL10B104KA8NNNC, Manufacturer Part Number 5=CGA3E2X7R1E104K080AA, Manufacturer Part Number 6=0603B104K250CT, Operating Temperature="-55C to +125C", Package=0603, Supplier Part Number 1=399-17572-2-ND, Temperature Coefficient=X7R, Tolerance=10%, Voltage=25V, Category=Capacitor, ComponentLink1Description="SVN Datasheet", ComponentLink1URL=https://chn-vm-apps.microchip.com/mchprepo/parts/Datasheets/KEM_C1002_X7R_SMD.pdf, ComponentLink2Description="Local Datasheet", ComponentLink2URL=C:\ALTIUM_WORK\00001_MCHP-CDB\Datasheets\KEM_C1002_X7R_SMD.pdf, ComponentLink3Description="Open Symbol", ComponentLink3URL="C:\ALTIUM_WORK\00001_MCHP-CDB\Library\LibraryRefs\Capacitor NP.SchLib", ComponentLink4Description="Open Footprint", ComponentLink4URL=C:\ALTIUM_WORK\00001_MCHP-CDB\Library\Footprints\CAP_C_0603.PcbLib, ComponentLink5Description="Open Footprint 2", ComponentLink6Description="Open Footprint 3", ComponentLink7Description="Open Footprint 4", Description_="CAP CER 0.1uF 25V 10% X7R SMD 0603", Dev Tools Status=Production, Manufacturer 3="KYOCERA AVX", MCHP-ID=CAP2605, Owner="Cristina Salanti", Quantity Override=1, Restricted Sourcing=No, Revision=1, Status="MCL Design", Supplier 1=Digi-Key, Supplier 2=Digi-Key, Supplier 3=Digi-Key, Supplier 4=Digi-Key, Supplier 5=Digi-Key, Supplier 6=Digi-Key, Supplier Part Number 2=478-3539-2-ND, Supplier Part Number 3=478-7018-2-ND, Supplier Part Number 4=1276-1006-2-ND, Supplier Part Number 5=445-5667-2-ND, Supplier Part Number 6=1292-1642-2-ND, Symbol="Capacitor NP", Type=Ceramic
  C3: Populated=DNP
  C4 C11 C21 C31: Populated=YES
C_LP: library part CAP2699, Manufacturer 1="TDK Corporation", Manufacturer 3="Murata Electronics", Manufacturer Part Number 1=C2012C0G1H333J125AA, Manufacturer Part Number 2=C2012C0G1H333J125AE, Manufacturer Part Number 3=GRM2165C1H333JA01J, Operating Temperature="-55C to +125C", Package=0805, Supplier Part Number 1=445-7523-2-ND, Temperature Coefficient=C0G, Tolerance=5%, Voltage=50V, Category=Capacitor, ComponentLink1Description="SVN Datasheet", ComponentLink1URL=https://chn-vm-apps.microchip.com/mchprepo/parts/Datasheets/mlcc_commercial_general_en.pdf, ComponentLink2Description="Local Datasheet", ComponentLink2URL=C:\ALTIUM_WORK\00001_MCHP-CDB\Datasheets\mlcc_commercial_general_en.pdf, ComponentLink3Description="Open Symbol", ComponentLink3URL="C:\ALTIUM_WORK\00001_MCHP-CDB\Library\LibraryRefs\Capacitor NP.SchLib", ComponentLink4Description="Open Footprint", ComponentLink4URL=C:\ALTIUM_WORK\00001_MCHP-CDB\Library\Footprints\CAP_C_0805.PcbLib, ComponentLink5Description="Open Footprint 2", ComponentLink6Description="Open Footprint 3", ComponentLink7Description="Open Footprint 4", Description_="CAP CER 0.033uF 50V 5% C0G SMD 0805", Dev Tools Status=Design, Manufacturer 2="TDK Corporation", MCHP-ID=CAP2699, Owner="Florin Paun", Populated=YES, Quantity Override=1, Restricted Sourcing=No, Revision=1, Status="MCL Design", Supplier 1=Digi-Key, Supplier 2=Digi-Key, Supplier 3=Digi-Key, Supplier Part Number 2=445-C2012C0G1H333J125AETR-ND, Supplier Part Number 3=490-GRM2165C1H333JA01JTR-ND, Symbol="Capacitor NP", Type=Ceramic
C_MCU C_OP1: library part CAP0006, Manufacturer 1=KEMET, Manufacturer 2="KYOCERA AVX", Manufacturer 3="Samsung Electro-Mechanics", Manufacturer 4=Yageo, Manufacturer Part Number 1=C0805C103K5RACTU, Manufacturer Part Number 2=08055C103KAT2A, Manufacturer Part Number 3=CL21B103KBCNNNC, Manufacturer Part Number 4=CC0805KRX7R9BB103, Manufacturer Part Number 5=CL21B103KBANNNC, Operating Temperature="-55C to +125C", Package=0805, Supplier Part Number 1=399-1158-2-ND, Temperature Coefficient=X7R, Tolerance=10%, Voltage=50V, Category=Capacitor, ComponentLink1Description="SVN Datasheet", ComponentLink1URL=https://chn-vm-apps.microchip.com/mchprepo/parts/Datasheets/CL_Series_MLCC_ds.pdf, ComponentLink2Description="Local Datasheet", ComponentLink2URL=C:\ALTIUM_WORK\00001_MCHP-CDB\Datasheets\CL_Series_MLCC_ds.pdf, ComponentLink3Description="Open Symbol", ComponentLink3URL="C:\ALTIUM_WORK\00001_MCHP-CDB\Library\LibraryRefs\Capacitor NP.SchLib", ComponentLink4Description="Open Footprint", ComponentLink4URL=C:\ALTIUM_WORK\00001_MCHP-CDB\Library\Footprints\CAP_C_0805.PcbLib, ComponentLink5Description="Open Footprint 2", ComponentLink6Description="Open Footprint 3", ComponentLink7Description="Open Footprint 4", Description_="CAP CER 10000pF 50V 10% X7R SMD 0805", Dev Tools Status=Production, Manufacturer 5="Samsung Electro-Mechanics", MCHP-ID=CAP0006, Populated=YES, Quantity Override=1, Restricted Sourcing=No, Revision=5, Status="MCL Design", Supplier 1=Digi-Key, Supplier 2=Digi-Key, Supplier 3=Digi-Key, Supplier 4=Digi-Key, Supplier 5="Samsung Electro-Mechanics", Supplier Part Number 2=478-1383-1-ND, Supplier Part Number 3=1276-1078-1-ND, Supplier Part Number 4=311-1136-1-ND, Supplier Part Number 5=CL21B103KBANNNC, Symbol="Capacitor NP", Type=Ceramic
C_OP2 C_OP3: library part CAP2775, Manufacturer 1=KEMET, Manufacturer 2=Murata, Manufacturer 3="TDK Corporation", Manufacturer Part Number 1=C0805C153J5GACAUTO, Manufacturer Part Number 2=GCM2195C1H153JA16D, Manufacturer Part Number 3=CGA4F2C0G1H153J085AA, Operating Temperature="-55C to +125C", Package=0805, Supplier Part Number 1=80-C0805C153J5GAUTO, Temperature Coefficient=C0G, Tolerance=5%, Voltage=50V, Category=Capacitor, ComponentLink1Description="SVN Datasheet", ComponentLink1URL=https://chn-vm-apps.microchip.com/mchprepo/parts/Datasheets/KEM_C1022_C0G_AUTO_SMD.pdf, ComponentLink2Description="Local Datasheet", ComponentLink2URL=C:\ALTIUM_WORK\00001_MCHP-CDB\Datasheets\KEM_C1022_C0G_AUTO_SMD.pdf, ComponentLink3Description="Open Symbol", ComponentLink3URL="C:\ALTIUM_WORK\00001_MCHP-CDB\Library\LibraryRefs\Capacitor NP.SchLib", ComponentLink4Description="Open Footprint", ComponentLink4URL=C:\ALTIUM_WORK\00001_MCHP-CDB\Library\Footprints\CAP_C_0805.PcbLib, ComponentLink5Description="Open Footprint 2", ComponentLink6Description="Open Footprint 3", ComponentLink7Description="Open Footprint 4", Description_="CAP CER 0.015uF 50V 5% C0G SMD 0805 AEC-Q200", Dev Tools Status=Design, MCHP-ID=CAP2775, Owner="Bianca Nastase", Populated=YES, Quantity Override=1, Restricted Sourcing=No, Revision=1, Status="MCL Design", Supplier 1=Mouser, Supplier 2=Mouser, Supplier 3=Mouser, Supplier Part Number 2=81-GCM2195C1H153JA6D, Supplier Part Number 3=810-CGA4F2C0G1H153J, Symbol="Capacitor NP", Type=Ceramic
C_OP4 C_OP5: library part CAP2237, Manufacturer 1="TDK Corporation", Manufacturer 2=KEMET, Manufacturer Part Number 1=CGA3E2C0G1H682J080AA, Manufacturer Part Number 2=C0603C682J5GACAUTO, Operating Temperature="-55C to +125C", Package=0603, Supplier Part Number 1=445-6914-1-ND, Temperature Coefficient=C0G, Tolerance=5%, Voltage=50V, Category=Capacitor, ComponentLink1Description="SVN Datasheet", ComponentLink1URL=https://chn-vm-apps.microchip.com/mchprepo/parts/Datasheets/CGA3E2C0G1H682J080AA.pdf, ComponentLink2Description="Local Datasheet", ComponentLink2URL=C:\ALTIUM_WORK\00001_MCHP-CDB\Datasheets\CGA3E2C0G1H682J080AA.pdf, ComponentLink3Description="Open Symbol", ComponentLink3URL="C:\ALTIUM_WORK\00001_MCHP-CDB\Library\LibraryRefs\Capacitor NP.SchLib", ComponentLink4Description="Open Footprint", ComponentLink4URL=C:\ALTIUM_WORK\00001_MCHP-CDB\Library\Footprints\CAP_C_0603.PcbLib, ComponentLink5Description="Open Footprint 2", ComponentLink6Description="Open Footprint 3", ComponentLink7Description="Open Footprint 4", Description_="CAP CER 6.8nF 50V 5% C0G SMD 0603 AEC-Q200", Dev Tools Status=Production, MCHP-ID=CAP2237, Owner="Steve Dziaba", Populated=YES, Quantity Override=1, Restricted Sourcing=No, Revision=1, Status="MCL Design", Supplier 1=Digi-Key, Supplier 2=Digi-Key, Supplier Part Number 2=399-15947-1-ND, Symbol="Capacitor NP", Type=Ceramic
C_pi1 C_pi2: library part CAP1047, Manufacturer 1="Samsung Electro-Mechanics", Manufacturer 2="TDK Corporation", Manufacturer Part Number 1=CL10B104MB8NNNC, Manufacturer Part Number 2=C1608X7R1H104M080AA, Operating Temperature="-55C to +125C", Package=0603, Supplier Part Number 1=1276-1941-2-ND, Temperature Coefficient=X7R, Tolerance=20%, Voltage=50V, Category=Capacitor, ComponentLink1Description="SVN Datasheet", ComponentLink1URL=https://chn-vm-apps.microchip.com/mchprepo/parts/Datasheets/general_B11.pdf, ComponentLink2Description="Local Datasheet", ComponentLink2URL=C:\ALTIUM_WORK\00001_MCHP-CDB\Datasheets\general_B11.pdf, ComponentLink3Description="Open Symbol", ComponentLink3URL="C:\ALTIUM_WORK\00001_MCHP-CDB\Library\LibraryRefs\Capacitor NP.SchLib", ComponentLink4Description="Open Footprint", ComponentLink4URL=C:\ALTIUM_WORK\00001_MCHP-CDB\Library\Footprints\CAP_C_0603.PcbLib, ComponentLink5Description="Open Footprint 2", ComponentLink6Description="Open Footprint 3", ComponentLink7Description="Open Footprint 4", Description_="CAP CER 0.1uF 50V 20% X7R SMD 0603", Dev Tools Status=Production, MCHP-ID=CAP1047, Owner="Leah Whitaker", Populated=Yes, Quantity Override=1, Restricted Sourcing=No, Revision=3, Status="MCL Design", Supplier 1=Digi-Key, Supplier 2=Digi-Key, Supplier Part Number 2=445-5098-1-ND, Symbol="Capacitor NP", Type=Ceramic
C_Power_24V: library part CAP2936, Manufacturer 1=Murata, Manufacturer Part Number 1=GRM21BR61H106KE43L, Operating Temperature="-55°C ~ 85°C", Package=0805, Supplier Part Number 1=490-18663-1-ND, Temperature Coefficient=X5R, Tolerance=10%, Voltage=50V, Category=Capacitor, ComponentLink1Description="SVN Datasheet", ComponentLink1URL=https://chn-vm-apps.microchip.com/mchprepo/parts/Datasheets/GRM21BR61H106KE43-01A.pdf, ComponentLink2Description="Local Datasheet", ComponentLink2URL=C:\ALTIUM_WORK\00001_MCHP-CDB\Datasheets\GRM21BR61H106KE43-01A.pdf, ComponentLink3Description="Open Symbol", ComponentLink3URL="C:\ALTIUM_WORK\00001_MCHP-CDB\Library\LibraryRefs\Capacitor NP.SchLib", ComponentLink4Description="Open Footprint", ComponentLink4URL=C:\ALTIUM_WORK\00001_MCHP-CDB\Library\Footprints\CAP_C_0805.PcbLib, ComponentLink5Description="Open Footprint 2", ComponentLink6Description="Open Footprint 3", ComponentLink7Description="Open Footprint 4", Description_="CAP CER 10uF 50V 10% X5R SMD 0805", Dev Tools Status=Production, MCHP-ID=CAP2936, Owner="Sam Charles", Populated=YES, Quantity Override=1, Restricted Sourcing=No, Revision=1, Status="MCL Design", Supplier 1=Digi-Key, Symbol="Capacitor NP", Type=Ceramic
D_protect: library part DIODE0118, Forward Current=1A, Manufacturer 1="Micro Commercial Components Corporation", Manufacturer 2="Yangzhou Yangjie Electronic Technology Co., Ltd.", Manufacturer Part Number 1=1N4007-T, Manufacturer Part Number 2=1N4007, Operating Temperature="-55C to +150C", Package=DO-41, Reverse Current=5uA, Reverse Voltage=1000V, Supplier Part Number 1=1N4007-TPMSCT-ND, Category=Diode, ComponentLink1Description="SVN Datasheet", ComponentLink1URL=https://chn-vm-apps.microchip.com/mchprepo/parts/Datasheets/1N4001-1N4007_DO-41_.pdf, ComponentLink2Description="Local Datasheet", ComponentLink2URL=C:\ALTIUM_WORK\00001_MCHP-CDB\Datasheets\1N4001-1N4007_DO-41_.pdf, ComponentLink3Description="Open Symbol", ComponentLink3URL="C:\ALTIUM_WORK\00001_MCHP-CDB\Library\LibraryRefs\Diode Single.SchLib", ComponentLink4Description="Open Footprint", ComponentLink4URL=C:\ALTIUM_WORK\00001_MCHP-CDB\Library\Footprints\DO-41.PcbLib, ComponentLink5Description="Open Footprint 2", ComponentLink6Description="Open Footprint 3", ComponentLink7Description="Open Footprint 4", Description_="DIO RECT 1N4007 1V 1A 1000V DO-41", Dev Tools Status=Production, MCHP-ID=DIODE0118, Populated=Yes, Quantity Override=1, Restricted Sourcing=No, Revision=2, Status="MCL Design", Supplier 1=Digi-Key, Supplier 2="Yangzhou Yangjie Electronic Technology Co., Ltd.", Supplier Part Number 2=1N4007, Symbol="Diode Single", Type="Rectifier Single"
D_TVS: library part DIODE1321, Manufacturer 1=Vishay, Manufacturer Part Number 1=SMBJ30A-E3/52, Package=DO-214AA, Power=600W, Reverse Voltage=30V, Supplier Part Number 1=SMBJ30A-E3/52GICT-ND, Category=Diode, ComponentLink1Description="SVN Datasheet", ComponentLink1URL=https://chn-vm-apps.microchip.com/mchprepo/parts/Datasheets/smbj50a.pdf, ComponentLink2Description="Local Datasheet", ComponentLink2URL=C:\ALTIUM_WORK\00001_MCHP-CDB\Datasheets\smbj50a.pdf, ComponentLink3Description="Open Symbol", ComponentLink3URL="C:\ALTIUM_WORK\00001_MCHP-CDB\Library\LibraryRefs\Diode TVS Unidirectional.SchLib", ComponentLink4Description="Open Footprint", ComponentLink4URL=C:\ALTIUM_WORK\00001_MCHP-CDB\Library\Footprints\DO-214AA_SMB.PcbLib, ComponentLink5Description="Open Footprint 2", ComponentLink6Description="Open Footprint 3", ComponentLink7Description="Open Footprint 4", Description_="DIODE TVS SMBJ30A-E3/52 30V 600W SMD DO-214AA_SMB", Dev Tools Status=Design, MCHP-ID=DIODE1321, Owner="Mark Loper", Populated=YES, Quantity Override=1, Restricted Sourcing=No, Revision=1, Status="MCL Design", Supplier 1=Digi-Key, Symbol="Diode TVS Unidirectional", Type=TVS
"DAC Offset" "LP Out" "Opamp Out" SENS+ "VDD MCU": library part CON1084, Manufacturer 1=Keystone, Manufacturer 2="FuZhou XiXiang", Manufacturer Part Number 1=5010, Manufacturer Part Number 2="Test Point-1P-DIP-H4.6-Ø2.5-RED", Manufacturer Part Number 3="Test Point-1P-DIP-H8.1-Ø3.2-RED", Supplier Part Number 1=36-5010-ND, Category=Connector, ComponentLink1Description="SVN Datasheet", ComponentLink1URL=https://chn-vm-apps.microchip.com/mchprepo/parts/Datasheets/5010.pdf, ComponentLink2Description="Local Datasheet", ComponentLink2URL=C:\ALTIUM_WORK\00001_MCHP-CDB\Datasheets\5010.pdf, ComponentLink3Description="Open Symbol", ComponentLink3URL="C:\ALTIUM_WORK\00001_MCHP-CDB\Library\LibraryRefs\Test Point.SchLib", ComponentLink4Description="Open Footprint", ComponentLink4URL=C:\ALTIUM_WORK\00001_MCHP-CDB\Library\Footprints\CON_TP_TH_V_RED_KEC_5010.PcbLib, ComponentLink5Description="Open Footprint 2", ComponentLink6Description="Open Footprint 3", ComponentLink7Description="Open Footprint 4", Description_="CON TP LOOP Red TH", Dev Tools Status=Production, Manufacturer 3="FuZhou XiXiang", MCHP-ID=CON1084, Owner="Stephen Humberd", Populated=YES, Quantity Override=1, Restricted Sourcing=No, Revision=D, Status="MCL Design", Supplier 1=Digi-Key, Supplier 2="FuZhou XiXiang", Supplier 3="FuZhou XiXiang", Supplier Part Number 2="Test Point-1P-DIP-H4.6-Ø2.5-RED", Supplier Part Number 3="Test Point-1P-DIP-H8.1-Ø3.2-RED", Symbol="Test Point", Type="Test Point"
FB: library part FB1008, Manufacturer 1="Bourns Inc", Manufacturer Part Number 1=MZ1608-102Y, Operating Temperature="-55C to +125C", Package=0603, Saturation Current=100mA, Supplier Part Number 1=MZ1608-102YCT-ND, Test Frequency=100MHz, Category=Inductor, ComponentLink1Description="SVN Datasheet", ComponentLink1URL=https://chn-vm-apps.microchip.com/mchprepo/parts/Datasheets/mgmumz.pdf, ComponentLink2Description="Local Datasheet", ComponentLink2URL=C:\ALTIUM_WORK\00001_MCHP-CDB\Datasheets\mgmumz.pdf, ComponentLink3Description="Open Symbol", ComponentLink3URL="C:\ALTIUM_WORK\00001_MCHP-CDB\Library\LibraryRefs\Ferrite Bead.SchLib", ComponentLink4Description="Open Footprint", ComponentLink4URL=C:\ALTIUM_WORK\00001_MCHP-CDB\Library\Footprints\IND_C_0603.PcbLib, ComponentLink5Description="Open Footprint 2", ComponentLink6Description="Open Footprint 3", ComponentLink7Description="Open Footprint 4", DCR=0.6R, Description_="FERRITE 1k@100MHz 100mA SMD 0603", Dev Tools Status=Design, MCHP-ID=FB1008, Owner="Jojie Batislaon", Populated=YES, Quantity Override=1, Restricted Sourcing=No, Revision=A, Status="MCL Design", Supplier 1=Digi-Key, Symbol="Ferrite Bead", Type="Ferrite Bead"
GND "GND OpAmp" SENS-: library part MISC0025, Manufacturer 1=Keystone, Manufacturer 2="FuZhou XiXiang Electronic Technology", Manufacturer Part Number 1=5011, Manufacturer Part Number 2="Test Point-1P-DIP-H8.1-Ф3.2-BLACK", Supplier Part Number 1=36-5011-ND, Category=Connector, ComponentLink1Description="SVN Datasheet", ComponentLink1URL=https://chn-vm-apps.microchip.com/mchprepo/parts/Datasheets/M60-2p60.pdf, ComponentLink2Description="Local Datasheet", ComponentLink2URL=C:\ALTIUM_WORK\00001_MCHP-CDB\Datasheets\M60-2p60.pdf, ComponentLink3Description="Open Symbol", ComponentLink3URL="C:\ALTIUM_WORK\00001_MCHP-CDB\Library\LibraryRefs\Test Point.SchLib", ComponentLink4Description="Open Footprint", ComponentLink4URL=C:\ALTIUM_WORK\00001_MCHP-CDB\Library\Footprints\CON_TP_TH_V_BLK_KEC_5011.PcbLib, ComponentLink5Description="Open Footprint 2", ComponentLink6Description="Open Footprint 3", ComponentLink7Description="Open Footprint 4", Description_="CON TP LOOP Black TH", Dev Tools Status=Production, MCHP-ID=MISC0025, Owner="Tad Ahlvers", Populated=YES, Quantity Override=1, Restricted Sourcing=No, Revision=3, Status="MCL Design", Supplier 1=Digi-Key, Supplier 2="FuZhou XiXiang Electronic Technology", Supplier Part Number 2="Test Point-1P-DIP-H8.1-Ф3.2-BLACK", Symbol="Test Point", Type="Test Point"
J_Breakout1 J_Breakout2: library part CON2311, Manufacturer 1="Sullins Connector Solutions", Manufacturer Part Number 1=NPPN141BFCN-RC, Operating Temperature="-40C to +105C", Supplier Part Number 1=NPPN141BFCN-RC-ND, Assembly Type=TH, Category=Connector, ComponentLink1Description="SVN Datasheet", ComponentLink1URL=https://chn-vm-apps.microchip.com/mchprepo/parts/Datasheets/10483.pdf, ComponentLink2Description="Local Datasheet", ComponentLink2URL=C:\ALTIUM_WORK\00001_MCHP-CDB\Datasheets\10483.pdf, ComponentLink3Description="Open Symbol", ComponentLink3URL="C:\ALTIUM_WORK\00001_MCHP-CDB\Library\LibraryRefs\Header 1x14.SchLib", ComponentLink4Description="Open Footprint", ComponentLink4URL=C:\ALTIUM_WORK\00001_MCHP-CDB\Library\Footprints\HDR_F_2_1x14_TH_V.PcbLib, ComponentLink5Description="Open Footprint 2", ComponentLink6Description="Open Footprint 3", ComponentLink7Description="Open Footprint 4", Description_="CON HDR-2 Female 1x14 Gold 2.4MH TH", Dev Tools Status=Design, MCHP-ID=CON2311, Owner="Octavian Stroe", Populated=YES, Quantity Override=1, Restricted Sourcing=No, Revision=B, Status="MCL Design", Supplier 1=Digi-Key, Symbol="Header 1x14", Type="Header 2mm"
J_display: library part CON2735, Current=3A, Manufacturer 1="Sullins Connector Solutions", Manufacturer Part Number 1=PPPC091LFBN-RC, Operating Temperature="-40C to +105C", Supplier Part Number 1=S7042-ND, Voltage=250V, Assembly Type=TH, Category=Connector, ComponentLink1Description="SVN Datasheet", ComponentLink1URL=https://chn-vm-apps.microchip.com/mchprepo/parts/Datasheets/Female_Headers.100_DS.pdf, ComponentLink2Description="Local Datasheet", ComponentLink2URL=C:\ALTIUM_WORK\00001_MCHP-CDB\Datasheets\Female_Headers.100_DS.pdf, ComponentLink3Description="Open Symbol", ComponentLink3URL="C:\ALTIUM_WORK\00001_MCHP-CDB\Library\LibraryRefs\Header 1x9.SchLib", ComponentLink4Description="Open Footprint", ComponentLink4URL=C:\ALTIUM_WORK\00001_MCHP-CDB\Library\Footprints\HDR_F_2.54_1x9_TH_V_PPPC091LFBN-RC.PcbLib, ComponentLink5Description="Open Footprint 2", ComponentLink6Description="Open Footprint 3", ComponentLink7Description="Open Footprint 4", Description_="CON HDR-2.54 Female 1x9 Gold TH VERT", Dev Tools Status=Design, MCHP-ID=CON2735, Owner="Pilar Alcaine", Populated=YES, Quantity Override=1, Restricted Sourcing=No, Revision=1, Status="MCL Design", Supplier 1=Digi-Key, Symbol="Header 1x9", Type="Header 2.54mm"
J_ICSP: library part CON1106, Manufacturer 1=FCI, Manufacturer 3="Samtec Inc", Manufacturer 4="SHENZHEN JUNHAO ENGINEERING", Manufacturer Part Number 1=68000-106HLF, Manufacturer Part Number 2=68001-106HLF, Manufacturer Part Number 3=TSW-106-07-G-S, Manufacturer Part Number 4=R-211-0611-0021-400, Supplier Part Number 1=609-3249-ND, Category=Connector, ComponentLink1Description="SVN Datasheet", ComponentLink1URL=https://chn-vm-apps.microchip.com/mchprepo/parts/Datasheets/68000.pdf, ComponentLink2Description="Local Datasheet", ComponentLink2URL=C:\ALTIUM_WORK\00001_MCHP-CDB\Datasheets\68000.pdf, ComponentLink3Description="Open Symbol", ComponentLink3URL="C:\ALTIUM_WORK\00001_MCHP-CDB\Library\LibraryRefs\Header 1x6.SchLib", ComponentLink4Description="Open Footprint", ComponentLink4URL=C:\ALTIUM_WORK\00001_MCHP-CDB\Library\Footprints\HDR_M_2.54_1x6.PcbLib, ComponentLink5Description="Open Footprint 2", ComponentLink6Description="Open Footprint 3", ComponentLink7Description="Open Footprint 4", Description_="CON HDR-2.54 Male 1x6 Gold 5.84MH TH VERT", Dev Tools Status=Production, Manufacturer 2=FCI, MCHP-ID=CON1106, Owner="Bogdan P (M91398)", Populated=Yes, Quantity Override=1, Restricted Sourcing=No, Revision=3, Status="MCL Design", Supplier 1=Digi-Key, Supplier 2=Digi-Key, Supplier 3=Digi-Key, Supplier 4="SHENZHEN JUNHAO ENGINEERING", Supplier Part Number 2=609-3272-ND, Supplier Part Number 3=SAM1029-06-ND, Supplier Part Number 4=R-211-0611-0021-400, Symbol="Header 1x6", Type="Header 2.54mm"
J_Loop: library part CON1632, Current=3A, Manufacturer 1="Wuerth Elektronik", Manufacturer 2="Shanghai NS-TECH", Manufacturer Part Number 1=61300211121, Manufacturer Part Number 2=NS-201-SH0385-201S-1*2P(F), Supplier Part Number 1=732-5315-ND, Voltage=250V, Assembly Type=TH, Category=Connector, ComponentLink1Description="SVN Datasheet", ComponentLink1URL=https://chn-vm-apps.microchip.com/mchprepo/parts/Datasheets/6130xx11121.pdf, ComponentLink2Description="Local Datasheet", ComponentLink2URL=C:\ALTIUM_WORK\00001_MCHP-CDB\Datasheets\6130xx11121.pdf, ComponentLink3Description="Open Symbol", ComponentLink3URL="C:\ALTIUM_WORK\00001_MCHP-CDB\Library\LibraryRefs\Header 1x2.SchLib", ComponentLink4Description="Open Footprint", ComponentLink4URL=C:\ALTIUM_WORK\00001_MCHP-CDB\Library\Footprints\HDR_M_2.54_1x2.PcbLib, ComponentLink5Description="Open Footprint 2", ComponentLink6Description="Open Footprint 3", ComponentLink7Description="Open Footprint 4", Description_="CON HDR-2.54 Male 1x2 Gold 5.84MH TH VERT", Dev Tools Status=Production, MCHP-ID=CON1632, Owner="Narasimha Murthy", Populated=YES, Quantity Override=1, Restricted Sourcing=Yes, Revision=5, Status="MCL Design", Supplier 1=Digi-Key, Supplier 2="Shanghai NS-TECH", Supplier Part Number 2=NS-201-SH0385-201S-1*2P(F), Symbol="Header 1x2", Type="Header 2.54mm"
J_option: library part CON1105, Manufacturer 1="Amphenol ICC (FCI)", Manufacturer 2=Samtec, Manufacturer 3="SHENZHEN JUNHAO ENGINEERING", Manufacturer 4="Shanghai NS-TECH", Manufacturer Part Number 1=68000-103HLF, Manufacturer Part Number 2=TSW-103-07-G-S, Manufacturer Part Number 3=R-211-0311-0021-000, Manufacturer Part Number 4=NS-201-SH0100-1*3, Supplier Part Number 1=609-3461-ND, Category=Connector, ComponentLink1Description="SVN Datasheet", ComponentLink1URL=https://chn-vm-apps.microchip.com/mchprepo/parts/Datasheets/68000.pdf, ComponentLink2Description="Local Datasheet", ComponentLink2URL=C:\ALTIUM_WORK\00001_MCHP-CDB\Datasheets\68000.pdf, ComponentLink3Description="Open Symbol", ComponentLink3URL="C:\ALTIUM_WORK\00001_MCHP-CDB\Library\LibraryRefs\Header 1x3.SchLib", ComponentLink4Description="Open Footprint", ComponentLink4URL=C:\ALTIUM_WORK\00001_MCHP-CDB\Library\Footprints\HDR_M_2.54_1x3.PcbLib, ComponentLink5Description="Open Footprint 2", ComponentLink6Description="Open Footprint 3", ComponentLink7Description="Open Footprint 4", Description_="CON HDR-2.54 Male 1x3 Gold 5.84MH TH VERT", Dev Tools Status=Production, MCHP-ID=CON1105, Owner="Bogdan P (M91398)", Populated=Yes, Quantity Override=1, Restricted Sourcing=No, Revision=6, Status="MCL Design", Supplier 1=Digi-Key, Supplier 2=Digi-Key, Supplier 3="SHENZHEN JUNHAO ENGINEERING", Supplier 4="Shanghai NS-TECH", Supplier Part Number 2=SAM1029-03-ND, Supplier Part Number 3=R-211-0311-0021-000, Supplier Part Number 4=NS-201-SH0100-1*3, Symbol="Header 1x3", Type="Header 2.54mm"
J_Sensor: library part CON2391, Current=8A, Manufacturer 1="Adam Tech", Manufacturer Part Number 1=EB21A-04-D, Operating Temperature="-40C to +105C", Supplier Part Number 1=2057-EB21A-04-D-ND, Voltage=300V, Assembly Type=TH, Category=Connector, ComponentLink1Description="SVN Datasheet", ComponentLink1URL=https://chn-vm-apps.microchip.com/mchprepo/parts/Datasheets/eb21a-04-d-data-sheet.pdf, ComponentLink2Description="Local Datasheet", ComponentLink2URL=C:\ALTIUM_WORK\00001_MCHP-CDB\Datasheets\eb21a-04-d-data-sheet.pdf, ComponentLink3Description="Open Symbol", ComponentLink3URL="C:\ALTIUM_WORK\00001_MCHP-CDB\Library\LibraryRefs\Header 1x4.SchLib", ComponentLink4Description="Open Footprint", ComponentLink4URL=C:\ALTIUM_WORK\00001_MCHP-CDB\Library\Footprints\CON_TERMINAL_5.08_1x4_TH_L8.50W20.5H10.20.PcbLib, ComponentLink5Description="Open Footprint 2", ComponentLink6Description="Open Footprint 3", ComponentLink7Description="Open Footprint 4", Description_="CON TERMINAL 5.08mm 1x4 Female 16-26AWG 8A TH R/A", Dev Tools Status=Production, MCHP-ID=CON2391, Owner="Narasimha Murthy", Populated=YES, Quantity Override=1, Restricted Sourcing=No, Revision=1, Status="MCL Design", Supplier 1=Digi-Key, Symbol="Header 1x4", Type="Terminal Block"
J_terminal: library part CON2378, Current=13.5A, Manufacturer 1="Phoenix Contact", Manufacturer Part Number 1=1727010, Supplier Part Number 1=277-1947-ND, Voltage=300V, Assembly Type=TH, Category=Connector, ComponentLink1Description="SVN Datasheet", ComponentLink1URL=https://chn-vm-apps.microchip.com/mchprepo/parts/Datasheets/1727010.pdf, ComponentLink2Description="Local Datasheet", ComponentLink2URL=C:\ALTIUM_WORK\00001_MCHP-CDB\Datasheets\1727010.pdf, ComponentLink3Description="Open Symbol", ComponentLink3URL="C:\ALTIUM_WORK\00001_MCHP-CDB\Library\LibraryRefs\Header 1x2.SchLib", ComponentLink4Description="Open Footprint", ComponentLink4URL=C:\ALTIUM_WORK\00001_MCHP-CDB\Library\Footprints\CON_TERMINAL_3.81_1x2_TH_RA_PHO_1727010.PcbLib, ComponentLink5Description="Open Footprint 2", ComponentLink6Description="Open Footprint 3", ComponentLink7Description="Open Footprint 4", Description_="CON TERMINAL 3.81mm 1x2 Female 16-30AWG 13.5A TH R/A", Dev Tools Status=Design, MCHP-ID=CON2378, Owner="Kamatchi Sundaresan", Populated=YES, Quantity Override=1, Revision=A, Status="MCL Design", Supplier 1=Digi-Key, Symbol="Header 1x2", Type="Terminal Block"